# Altium PCB PCB1.PcbDoc
Units mm, origin at the board's own origin, x right, y up, seen from the top; angles counter-clockwise.
Board outline 72.7 x 50 mm, 2 copper layers (Top Layer, Bottom Layer); 33 components, 17 nets, 79 pads, 0 vias.
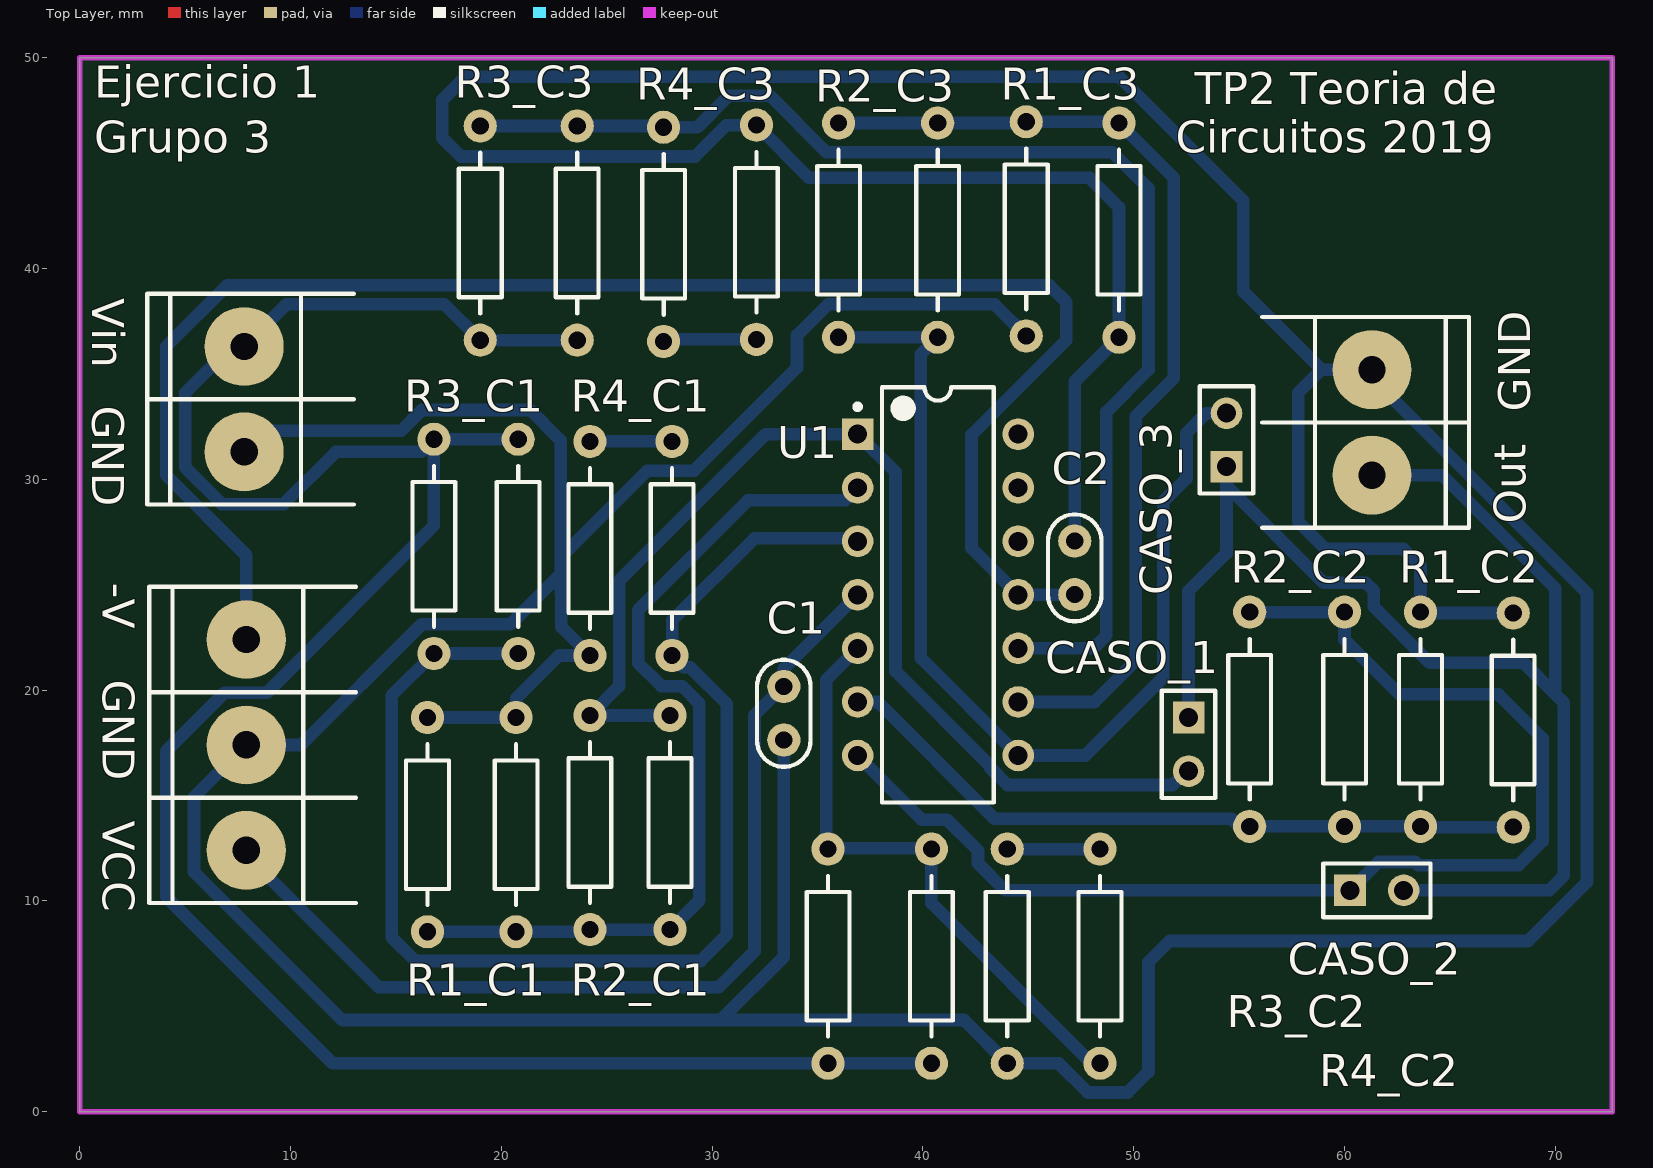
[diagram p0: Top Layer view]
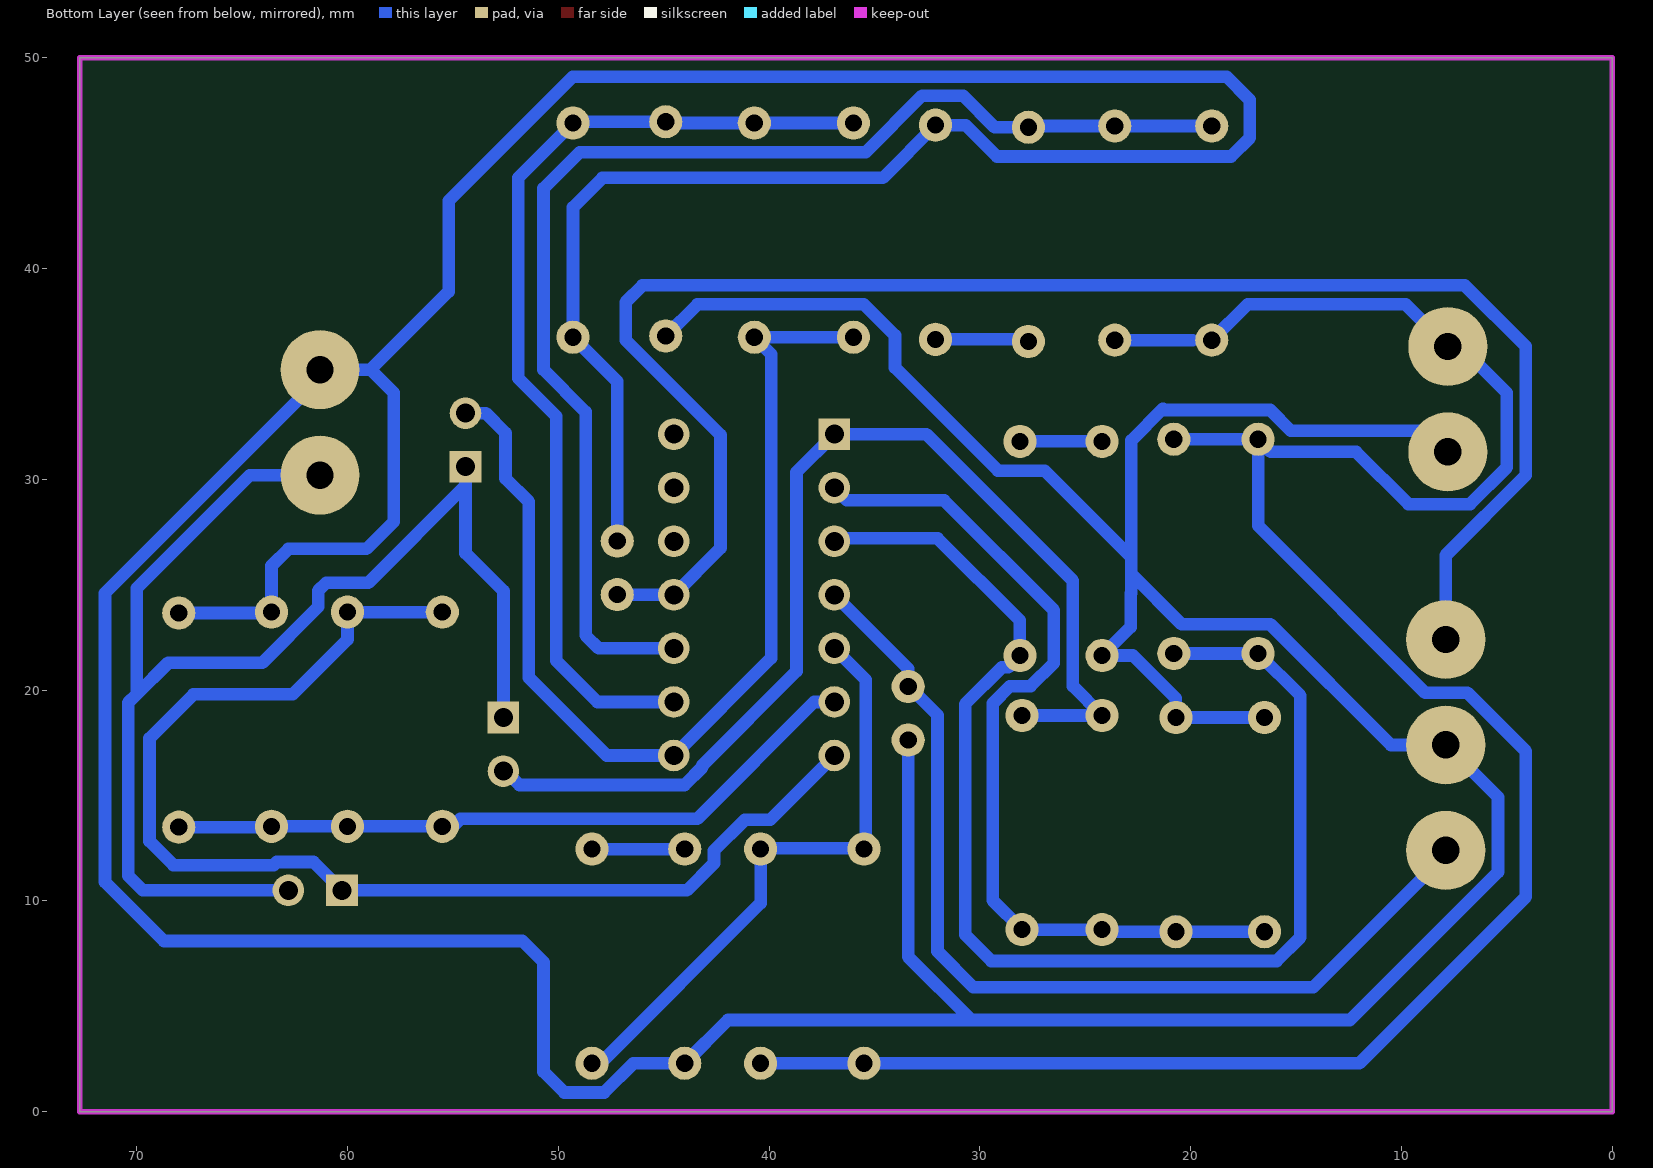
[diagram p1: Bottom Layer view, seen from below]
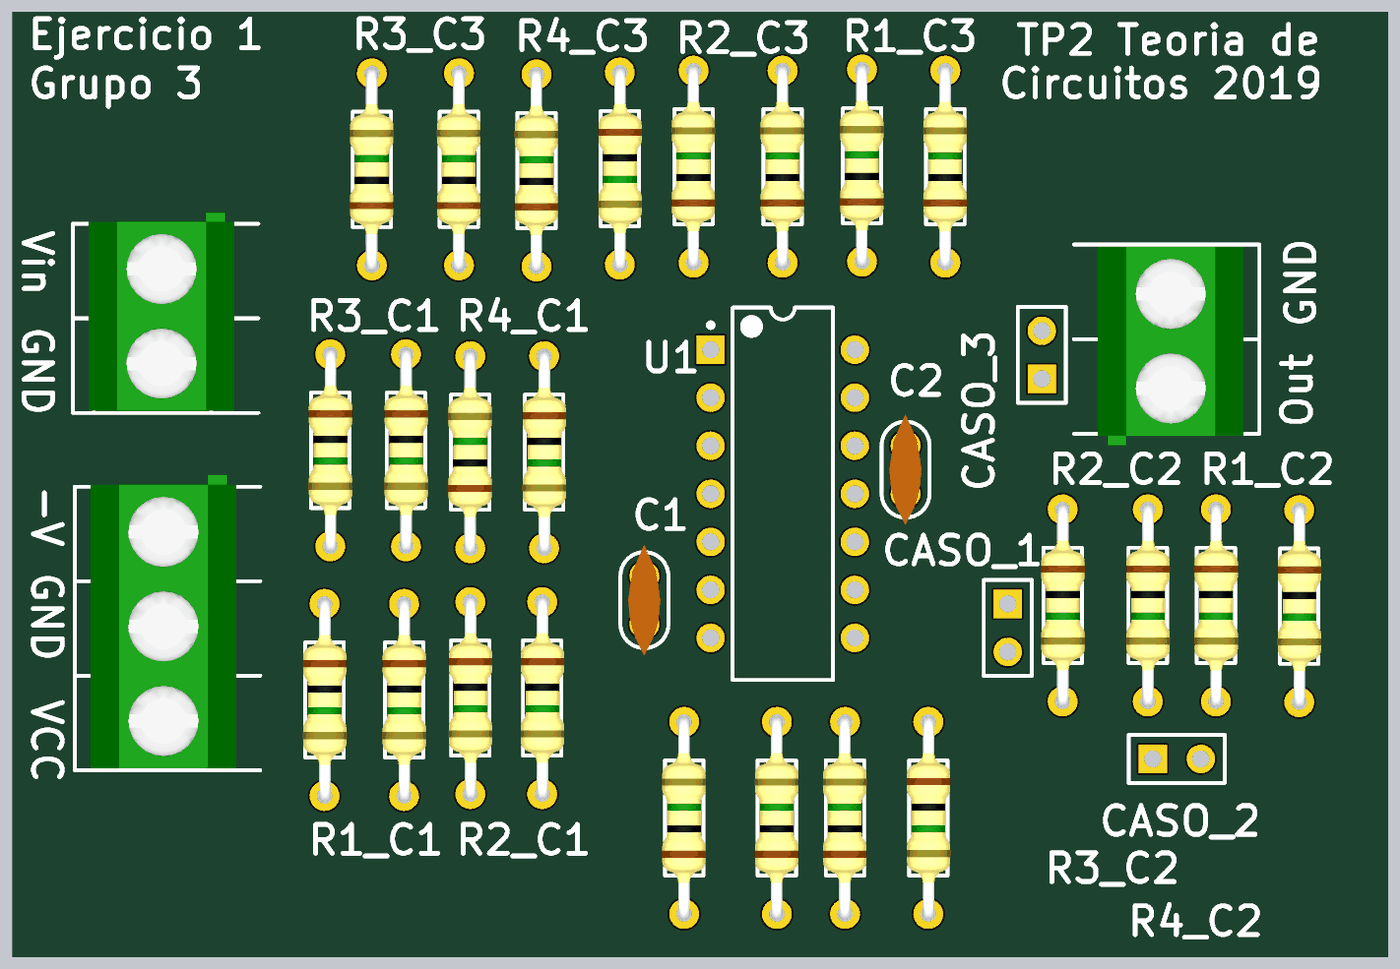
[diagram p2: 3D render of the assembled board from above, using the file's embedded part models]

## Layer stack, top to bottom
Top Solder: solder mask 0.0102, Solder Resist, Dk 3.5
Top Layer: signal copper 0.0356
Dielectric 1: dielectric 0.32, FR-4, Dk 4.8
Bottom Layer: signal copper 0.0356
Bottom Solder: solder mask 0.0102, Solder Resist, Dk 3.5

## Board outline
0,0 0,50 72.7,50 72.7,0

## Design rules (kind name [scope] priority, off if disabled: settings)
Clearance [All] p1: gap=0.3 ignorepadtopadclearanceinfootprint=FALSE
PolygonConnect [All] p1: connectstyle=Relief reliefconductorwidth=0.254 reliefentries=4 polygonreliefangle="90 Angle" airgapwidth=0.254
RoutingVias [All] p1: holewidth=0.7 width=2 viastyle="Through Hole" minholewidth=0.7 minwidth=2 maxholewidth=0.7 maxwidth=2
SolderMaskExpansion [All] p1: expansion=0.102
Width [All] p1: maxlimit=0.6 minlimit=0.6 preferedwidth=0.6
30 further rules are at their usual default settings.

## Classes and differential pairs
component class Esquematico: C1 C2 CASO_1 CASO_2 CASO_3 Out R1_C1 R1_C2 R1_C3 R2_C1 R2_C2 R2_C3 R3_C1 R3_C2 R3_C2' R3_C3 R4_C1 R4_C2 R4_C3 U1 VCC ""

## Components (designator, comment, footprint, x,y, rotation, side; value= is the part's Value field where it differs from the comment)
C1 "100n" CAP100 33.4,18.9 r90 top
C2 "100n" CAP100 47.2,25.8 r90 top
CASO_1 "Header 2" HDR1X2 52.6,18.7 r270 top
CASO_2 "Header 2" HDR1X2 60.26,10.5 r0 top
CASO_3 "Header 2" HDR1X2 54.4,30.6 r90 top
Input "BORNERA 2" BORNERA2 7.8,33.8 r0 top
Out "BORNERA 2" BORNERA2 61.3,32.7 r180 top (schematic designator Output)
R1_C1 "15K" RES400 20.7,18.7 r270 top
R1_C1' "15K" RES400 16.5,18.7 r270 top
R1_C2 "15K" RES400 63.6,23.7 r270 top
R1_C2' "15K" RES400 68,23.66 r270 top
R1_C3 "150K" RES400 49.3,36.74 r90 top
R1_C3' "150K" RES400 44.9,36.8 r90 top
R2_C1 "150K" RES400 28,18.8 r270 top
R2_C1' "150K" RES400 24.2,18.8 r270 top
R2_C2 "15K" RES400 55.5,23.7 r270 top
R2_C2' "15K" RES400 60,23.7 r270 top
R2_C3 "15K" RES400 40.7,36.74 r90 top
R2_C3' "15K" RES400 36,36.74 r90 top
R3_C1 "15K" RES400 20.8,31.9 r270 top
R3_C1' "15K" RES400 16.8,31.9 r270 top
R3_C2 "15K" RES400 40.4,2.3 r90 top
R3_C2' "15K" RES400 35.5,2.3 r90 top
R3_C3 "150K" RES400 19,36.6 r90 top
R3_C3' "150K" RES400 23.6,36.6 r90 top
R4_C1 "15K" RES400 28.1,31.8 r270 top
R4_C1' "15K" RES400 24.2,21.64 r90 top
R4_C2 "15K" RES400 48.4,12.46 r270 top
R4_C2' "15K" RES400 44,2.3 r90 top
R4_C3 "150K" RES400 27.7,36.54 r90 top
R4_C3' "150K" RES400 32.1,46.8 r270 top
U1 "LM324N" N14A 40.71,24.52 r0 top
VCC "BORNERA 3" BORNERA3 7.9,17.4 r0 top

## Footprints (in the part's own frame and the unit in brackets; to place one, negate y for a bottom-side part, rotate by r counter-clockwise, add the part's x,y. Pads: shape width x height; smd on the part's side, far side on the other; paste and mask are expansions set on the pad)
BORNERA2 [mm] "Bornera con Tornillos 5mm separación"
  round 3.75 hole 1.3: 1(0,2.5) 2(0,-2.5)
  silkscreen extent -4.6,-5 5.2,5, body extent -3.76,-4.89 3.94,5.61, height 10
BORNERA3 [mm] "Bornera con Tornillos 5mm separación"
  round 3.75 hole 1.3: 1(0,5) 2(0,0) 3(0,-5)
  silkscreen extent -4.6,-7.5 5.2,7.5, body extent -3.76,-7.39 3.94,8.11, height 10.05
CAP100 [mil]
  round 62 hole 32: 1(-50,0) 2(50,0)
  silkscreen extent -100,-50 100,50, body extent -115,-33 115,34, height 241
HDR1X2 [mm] "Connector; Header; 2 Position"
  rect 1.5x1.5 hole 0.9: 1(0,0)
  round 1.5 hole 0.9: 2(2.54,0)
  silkscreen extent -1.27,-1.27 3.81,1.27
N14A [mm] "DIP, 14-Leads, Row Spacing 7.62mm, Pitch 2.54mm, Body 19.56x6.35mm"
  rect 1.5x1.5 hole 0.9: 1(-3.81,7.62)
  round 1.5 hole 0.9: 2(-3.81,5.08) 3(-3.81,2.54) 4(-3.81,0) 5(-3.81,-2.54) 6(-3.81,-5.08) 7(-3.81,-7.62) 8(3.81,-7.62) 9(3.81,-5.08) 10(3.81,-2.54) 11(3.81,0) 12(3.81,2.54) 13(3.81,5.08) 14(3.81,7.62)
  silkscreen extent -3.93,-9.85 2.65,9.85, body extent -3.55,-9.85 3.55,9.85, height 5.08
RES400 [mil]
  round 62 hole 32: 1(0,0) 2(400,0)
  silkscreen extent 50,-40 350,40, body extent -12,-45 412,46, height 96

## Part data
C1 C2: library part CAP
CASO_1 CASO_2 CASO_3: "Header, 2-Pin", LatestRevisionDate=17-Jul-2002, LatestRevisionNote="Re-released for DXP Platform.", Publisher="Altium Limited"
R1_C1 R1_C1' R1_C2 R1_C2' R1_C3 R1_C3' R2_C1 R2_C1' R2_C2 R2_C2' R2_C3 R2_C3' R3_C1 R3_C1' R3_C2 R3_C2' R3_C3 R3_C3' R4_C1 R4_C1' R4_C2 R4_C2' R4_C3 R4_C3': library part RES
U1: "Low Power Quad Operational Amplifier, 14-pin MDIP", Manufacturer="National Semiconductor", PackageTopMarking=NSUZXYYTTE#*LM324N, PowerWise=N, Code_JEDEC=MS-001-AA, ComponentLink1Description="LM324 Datasheet", ComponentLink1URL=http://www.national.com/ds/LM/LM324.pdf, ComponentLink2Description="LM324 Web Page", ComponentLink2URL=http://www.national.com/pf/LM/LM324.html, ComponentLink3Description="N14A Package Page", ComponentLink3URL=http://www.national.com/packaging/folders/n14a.html, CompType=Amplifiers, DatasheetVersion=Aug-2000, LatestRevisionDate=13-Jan-2009, LatestRevisionNote="Sim Model Added.", PackageDescription="MDIP, .750 x .250 x.130in, 14 Lead, .100in Pitch", PackageReference=N14A, PackageVersion="revG, May-2006", PartNumber=LM324N, PinCount=14, Published=4-Dec-2008, Publisher="Altium Limited", RoHS=N

## Nets (pads, with @x,y where several pads share a name; then routed paths per layer and width w, separated by ;. In a path a pad name is that pad's centre, name@x,y a point inside that pad or via, vN(x,y) a via of type N, cw(c..) or ccw(c..) an arc to the next point about the centre after c; other vN are vias at no path point)
-VCC: C2.1 U1.11 VCC.1 | length 79.1
  Bottom Layer w0.6: VCC.1 7.9,26.4 4.1,30.2 4.1,36.3 7,39.2 46,39.2 46.8,38.4 46.8,36.6 42.3,32.1 42.3,26.74 U1.11 47.19,24.52 C2.1
GND: C1.1 C2.2 Input.2 Out.2 R1_C1'.1 R1_C1.1 R1_C2'.1 R1_C2.1 R1_C3'.1 R1_C3.1 R4_C1'.1 R4_C2'.1 R4_C3'.1 VCC.2 | length 338.3
  Bottom Layer w0.6: Input.2 Input.2@8.8,32.3 ; Input.2@8.85,32.35 Input.2@8.8,32.3 ; R1_C1'.1 R1_C1.1 20.7,19.6 22.74,21.64 R4_C1'.1 22.847,22.993 22.847,24.6 ; 22.813,24.6 22.813,25.513 ; C1.1 33.4,7.353 30.4,4.353 ; R1_C3'.1 43.4,38.3 35.5,38.3 34.027,36.827 34.027,35.3 29.14,30.413 26.925,30.413 22.813,26.3 ; C2.2 47.2,34.64 R1_C3.1 49.3,42.9 47.9,44.3 34.6,44.3 R4_C3'.1 30.673,46.8 29.185,45.313 18.087,45.313 17.2,46.2 17.2,48 18.3,49.1 49.3,49.1 55.2,43.2 55.2,38.9 58.9,35.2 ; R1_C2'.1 63.64,23.66 R1_C2.1 63.6,25.9 62.8,26.7 59.1,26.7 57.8,28 57.8,34.1 58.9,35.2 ; Input.2@8.8,32.3 15.238,32.3 16.225,33.287 21.249,33.287 21.312,33.35 22.813,31.849 22.813,26.3 ; 22.813,25.513 22.813,26.3 ; 22.813,25.513 20.427,23.127 16.225,23.127 10.498,17.4 VCC.2 5.425,14.925 5.425,11.375 12.447,4.353 30.4,4.353 ; 30.4,4.353 41.947,4.353 R4_C2'.1 46.438,2.3 47.825,0.913 49.713,0.913 50.7,1.9 50.7,7.1 51.7,8.1 68.7,8.1 71.5,10.9 71.5,24.6 61.3,34.8 Out.2 58.9,35.2
NetCASO_1_1: CASO_1.1 CASO_2.2 CASO_3.1 Out.1 | length 65.4
  Bottom Layer w0.6: CASO_1.1 52.6,24.7 54.4,26.5 54.4,29.7 ; CASO_3.1 54.4,29.7 ; Out.1 64.627,30.2 70,24.827 70,19.8 ; CASO_2.2 69.7,10.5 70.4,11.2 70.4,19.4 70,19.8 ; 54.4,29.7 59.013,25.087 61.013,25.087 61.388,24.712 61.388,23.951 64.038,21.3 68.5,21.3 70,19.8
NetCASO_1_2: CASO_1.2 R2_C1'.1 R2_C1.1 U1.1 | length 53.3
  Bottom Layer w0.6: R2_C1.1 R2_C1'.1 25.587,20.187 25.587,25.187 32.54,32.14 U1.1 38.7,30.34 38.7,20.9 43.17,16.43 43.17,16.341 44.011,15.5 51.84,15.5 CASO_1.2@52.5,16.16
NetCASO_2_1: CASO_2.1 R2_C2'.1 R2_C2.1 U1.7 | length 58.6
  Bottom Layer w0.6: U1.7 39.953,13.847 41.153,13.847 42.613,12.387 42.613,11.787 43.9,10.5 CASO_2.1 61.61,11.85 63.359,11.85 63.509,11.7 68.249,11.7 69.387,12.838 69.387,17.713 67.3,19.8 62.6,19.8 60,22.4 R2_C2'.1 R2_C2.1
NetCASO_3_2: CASO_3.2 R2_C3'.1 R2_C3.1 U1.8 | length 49.5
  Bottom Layer w0.6: R2_C3'.1 R2_C3.1 39.9,35.94 39.9,21.52 U1.8 47.7,16.9 51.4,20.6 51.4,28.94 52.5,30.04 52.5,32.2 53.44,33.14 CASO_3.2
NetInput_1: Input.1 R3_C1'.1 R3_C1.1 R3_C2'.1 R3_C2.1 R3_C3'.1 R3_C3.1 | length 109.2
  Bottom Layer w0.6: R3_C3.1 17.3,38.3 9.8,38.3 Input.1 7.2,36.3 5,34.1 5,30.573 6.748,28.825 9.675,28.825 12.15,31.3 16.2,31.3 R3_C1'.1 ; 19.9,36.6 R3_C3'.1 ; R3_C1.1 R3_C1'.1 ; R3_C2.1 R3_C2'.1 12,2.3 4.1,10.2 4.1,17.1 6.875,19.875 8.875,19.875 16.8,27.8 R3_C1'.1
NetR1_C1'_2: R1_C1'.2 R1_C1.2 R2_C1'.2 R2_C1.2 U1.2 | length 42.3
  Bottom Layer w0.6: R1_C1'.2 R1_C1.2 ; R1_C1.2@20.7,9 R1_C1.2 ; U1.2 36.3,29 31.7,29 26.487,23.787 26.487,21.291 27.591,20.187 28.575,20.187 29.387,19.375 29.387,10.027 R2_C1.2 R2_C1'.2 24.1,8.54 R1_C1.2
NetR1_C2'_2: R1_C2'.2 R1_C2.2 R2_C2'.2 R2_C2.2 U1.6 | length 33.6
  Bottom Layer w0.6: U1.6 37.86,19.44 43.4,13.9 54.64,13.9 55,13.54 R2_C2'.2 R1_C2.2 63.64,13.5 R1_C2'.2
NetR1_C3'_2: R1_C3'.2 R1_C3.2 R2_C3'.2 R2_C3.2 U1.9 | length 47.1
  Bottom Layer w0.6: R2_C3'.2 R2_C3.2 44.84,46.9 R1_C3'.2 49.24,46.96 R1_C3.2 51.9,44.3 51.9,34.8 50.1,33 50.1,21.4 48.14,19.44 U1.9
NetR3_C1'_2: R3_C1'.2 R3_C1.2 R4_C1.2 U1.3 | length 61.9
  Bottom Layer w0.6: R3_C1.2 R3_C1'.2 14.8,19.74 14.8,8.278 15.925,7.153 29.453,7.153 30.7,8.4 30.7,19.335 28.947,21.087 28.653,21.087 R4_C1.2 28.1,23.3 32,27.2 U1.3@36.76,27.2 ; U1.3@36.66,27.3 U1.3@36.76,27.2 ; U1.3 U1.3@36.76,27.2
NetR3_C2'_2: R3_C2'.2 R3_C2.2 R4_C2.2 U1.5 | length 28.7
  Bottom Layer w0.6: R3_C2'.2@35.42,12.5 35.42,20.5 U1.5 ; R3_C2'.2@35.5,12.5 40.36,12.5 R3_C2.2 40.4,9.9 48,2.3 R4_C2.2
NetR3_C3'_2: R3_C3'.2 R3_C3.2 R4_C3.2 U1.10 | length 60.6
  Bottom Layer w0.6: R3_C3.2 R3_C3'.2 R4_C3.2@27.7,46.76 ; R4_C3.2 29.3,46.7 30.8,48.2 32.738,48.2 35.425,45.513 48.987,45.513 50.7,43.8 50.7,35.2 48.7,33.2 48.7,22.6 48.08,21.98 U1.10
NetR4_C1'_2: R4_C1'.2 R4_C1.1 | length 3.9
  Bottom Layer w0.6: R4_C1'.2 R4_C1.1
NetR4_C2'_2: R4_C2'.2 R4_C2.1 | length 4.4
  Bottom Layer w0.6: R4_C2'.2 R4_C2.1
NetR4_C3'_2: R4_C3'.2 R4_C3.1 | length 4.8
  Bottom Layer w0.6: R4_C3.1@27.7,36.64 R4_C3'.2 R4_C3'.2@32.5,36.64
VCC: C1.2 U1.4 VCC.3 | length 46.9
  Bottom Layer w0.6: VCC.3@7.8,12.3 14.2,5.9 30.3,5.9 32.013,7.613 32.013,18.813 33.37,20.17 C1.2 33.4,21.02 U1.4 U1.4@36.62,24.8
pads on no net: U1.12 U1.13 U1.14

## Keep-outs
Keep-Out Layer:
  the board outline again, w0.254

## Silkscreen, mask and mechanical layers (free items; w line width, h text height)
Top Overlay:
  text "Ejercicio 1" at 0.7,48.1 h1.52
  text "TP2 Teoria de" at 52.9,47.8 h1.52
  text "Grupo 3" at 0.7,45.5 h1.52
  text "Circuitos 2019" at 52,45.5 h1.52
  text "Vin" at 0.6,38.6 h1.52 r270
  text "GND" at 0.6,33.5 h1.52 r270
  text "GND" at 68.8,33.2 h1.52 r90
  text "-V" at 1.1,25.1 h1.52 r270
  text "GND" at 1.1,20.5 h1.52 r270